# Altium PCB _PCB.PcbDoc
Units mm, origin at the board's own origin, x right, y up, seen from the top; angles counter-clockwise.
Board outline 38.25 x 58.75 mm, 4 copper layers (L1 SIG, L2 (GND), L3 (PWR), L4 SIG), stack 1.586 mm thick; 63 components, 57 nets, 281 pads, 67 vias.
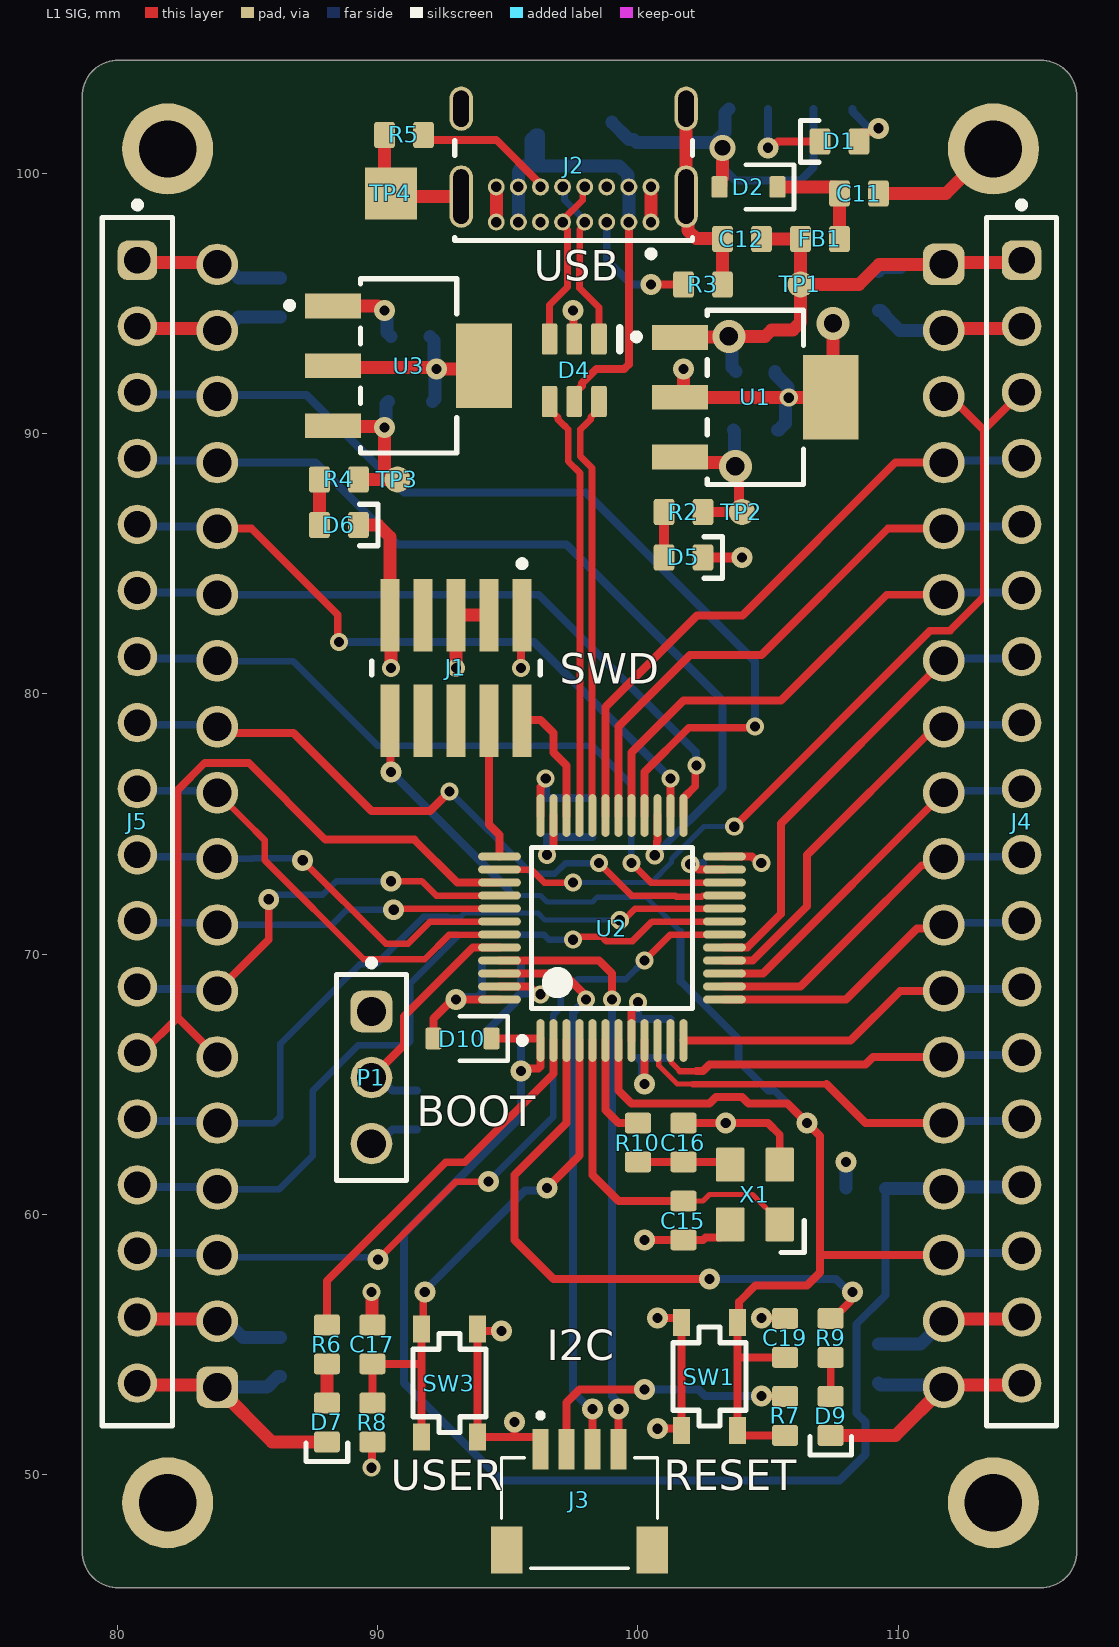
[diagram p0: L1 SIG view]
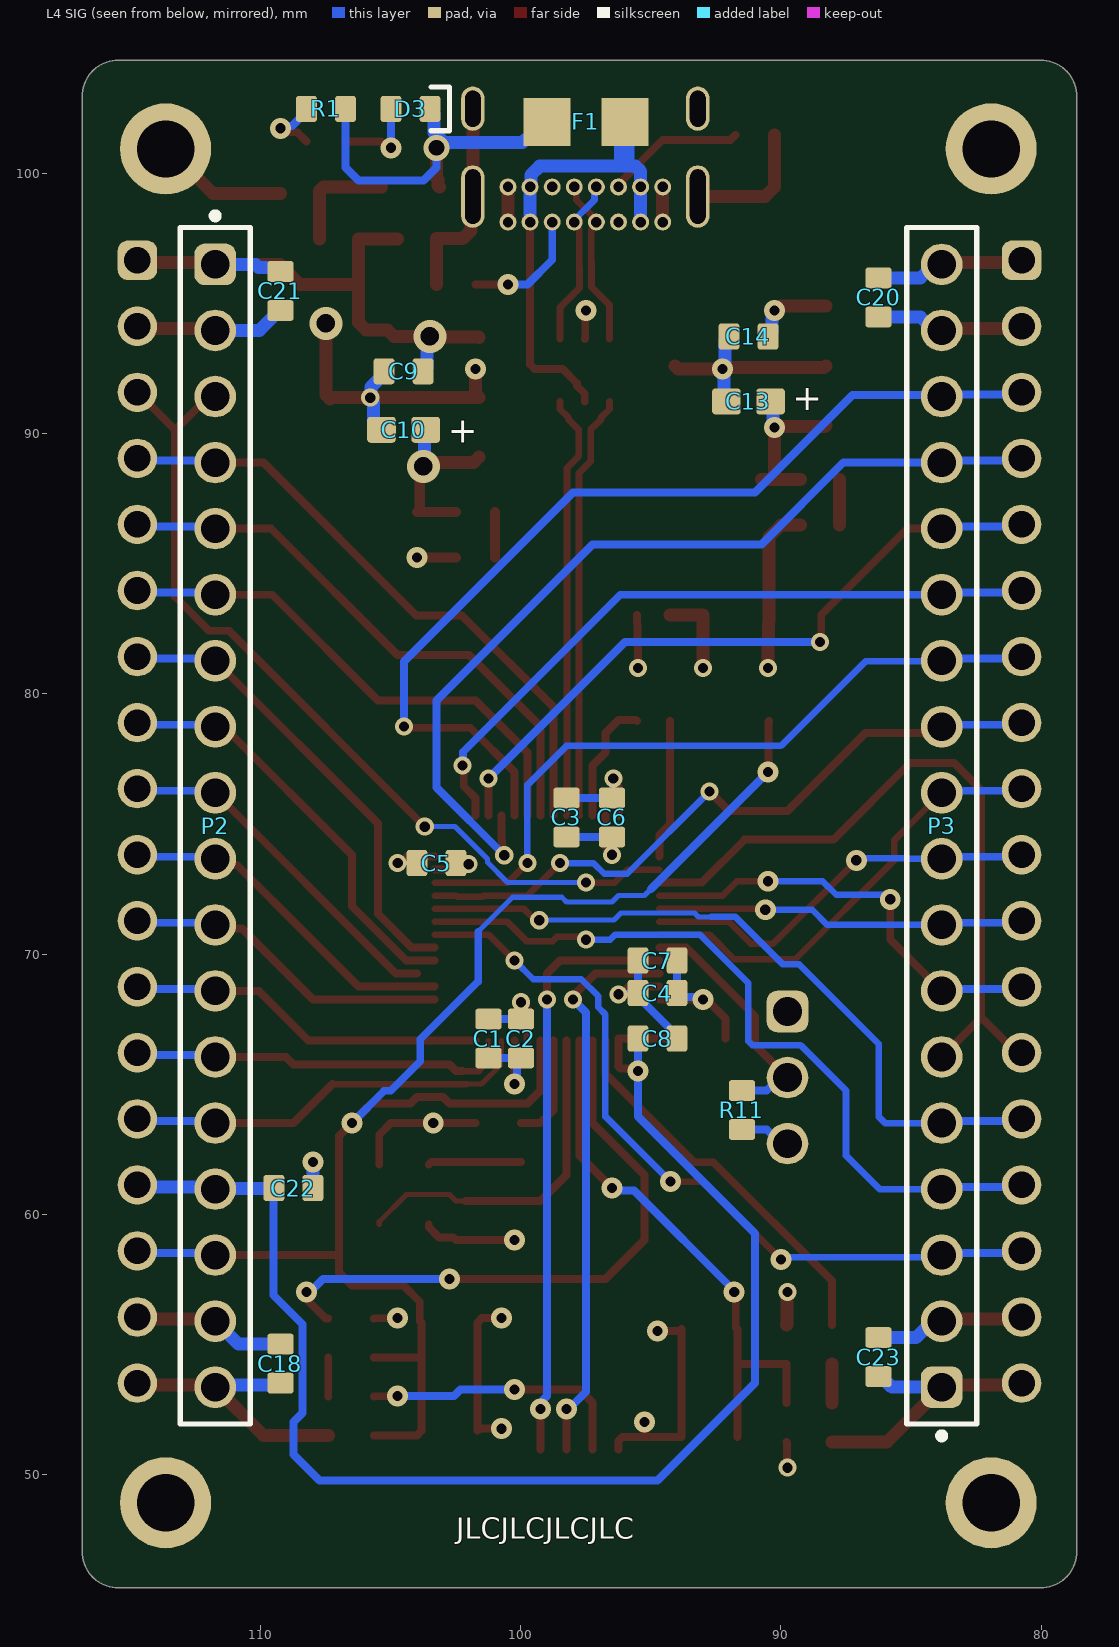
[diagram p1: L4 SIG view, seen from below]
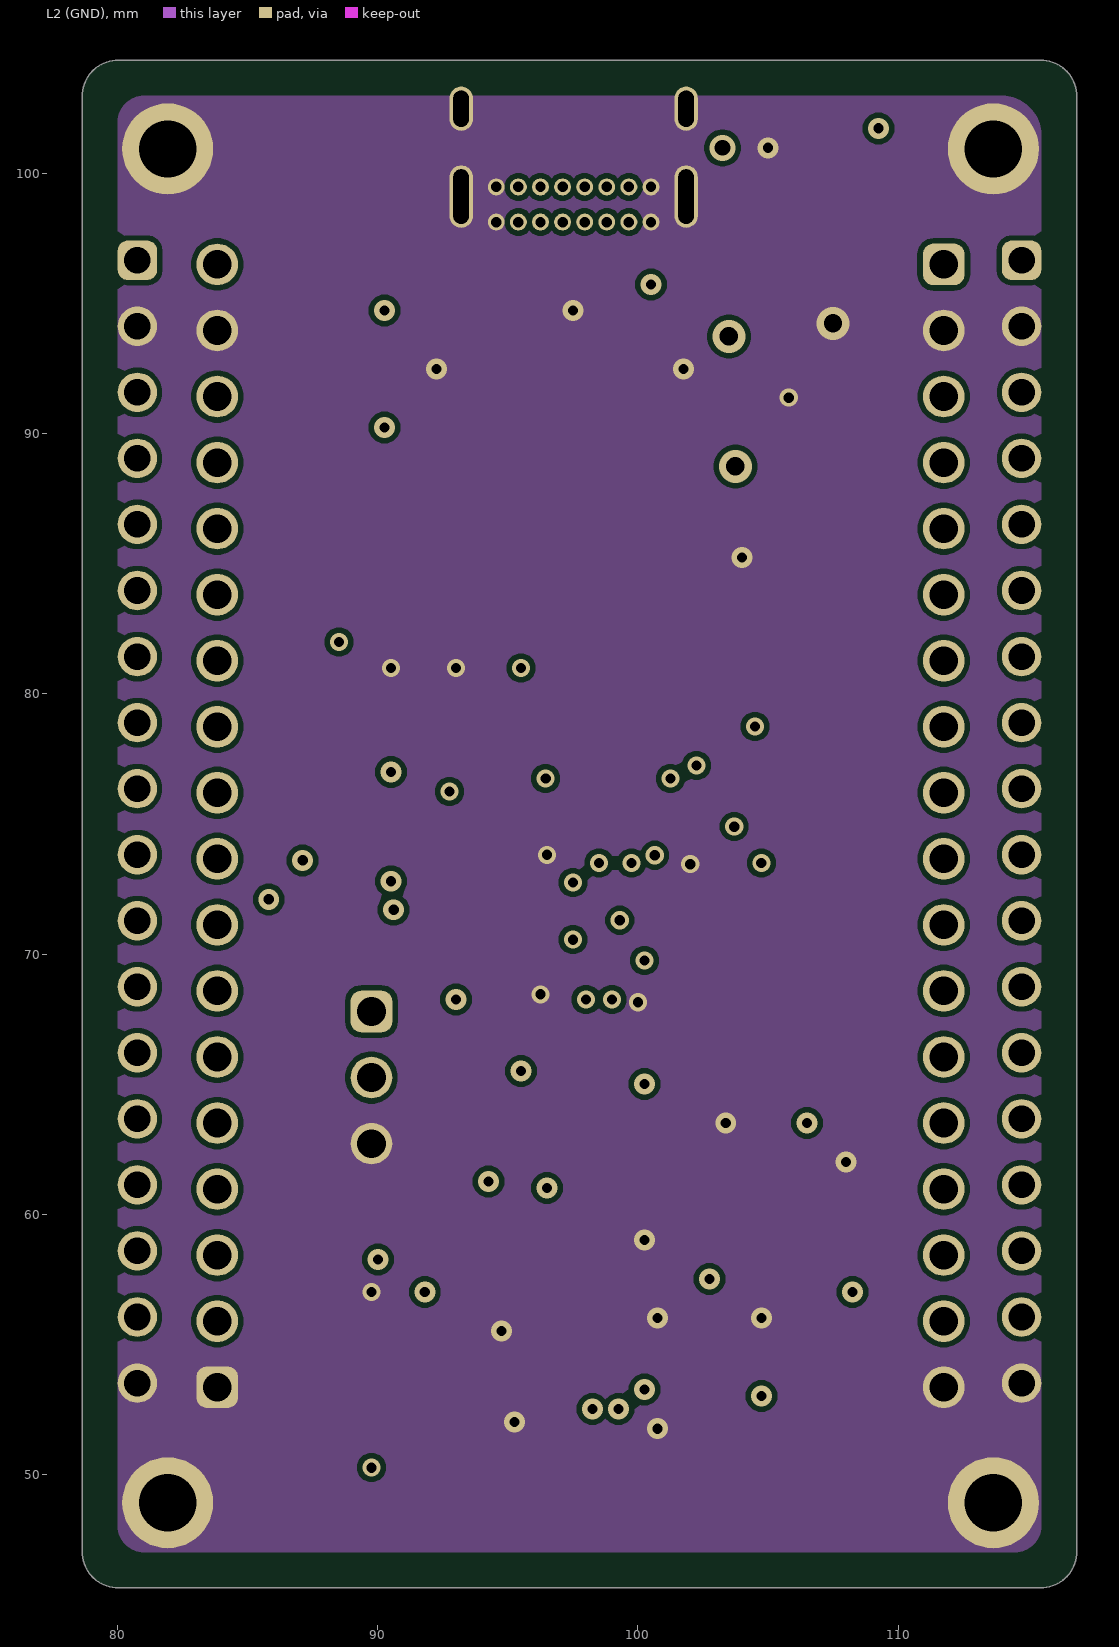
[diagram p2: L2 (GND)]
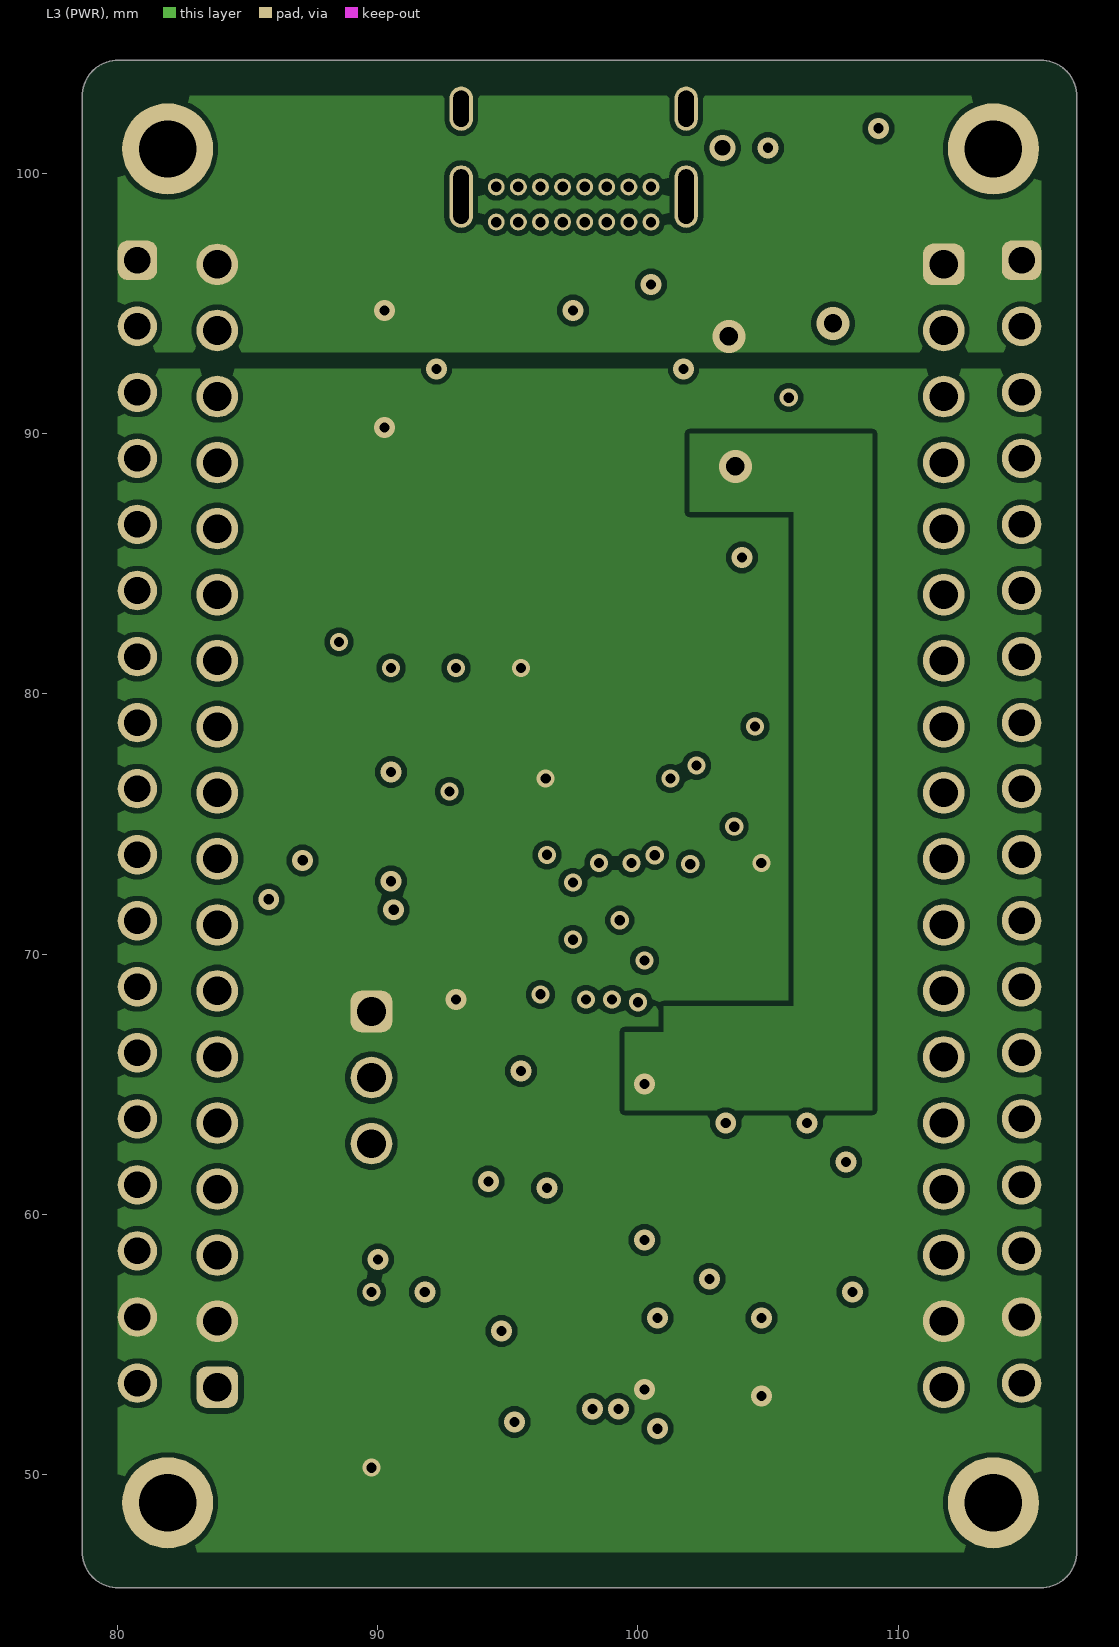
[diagram p3: L3 (PWR)]
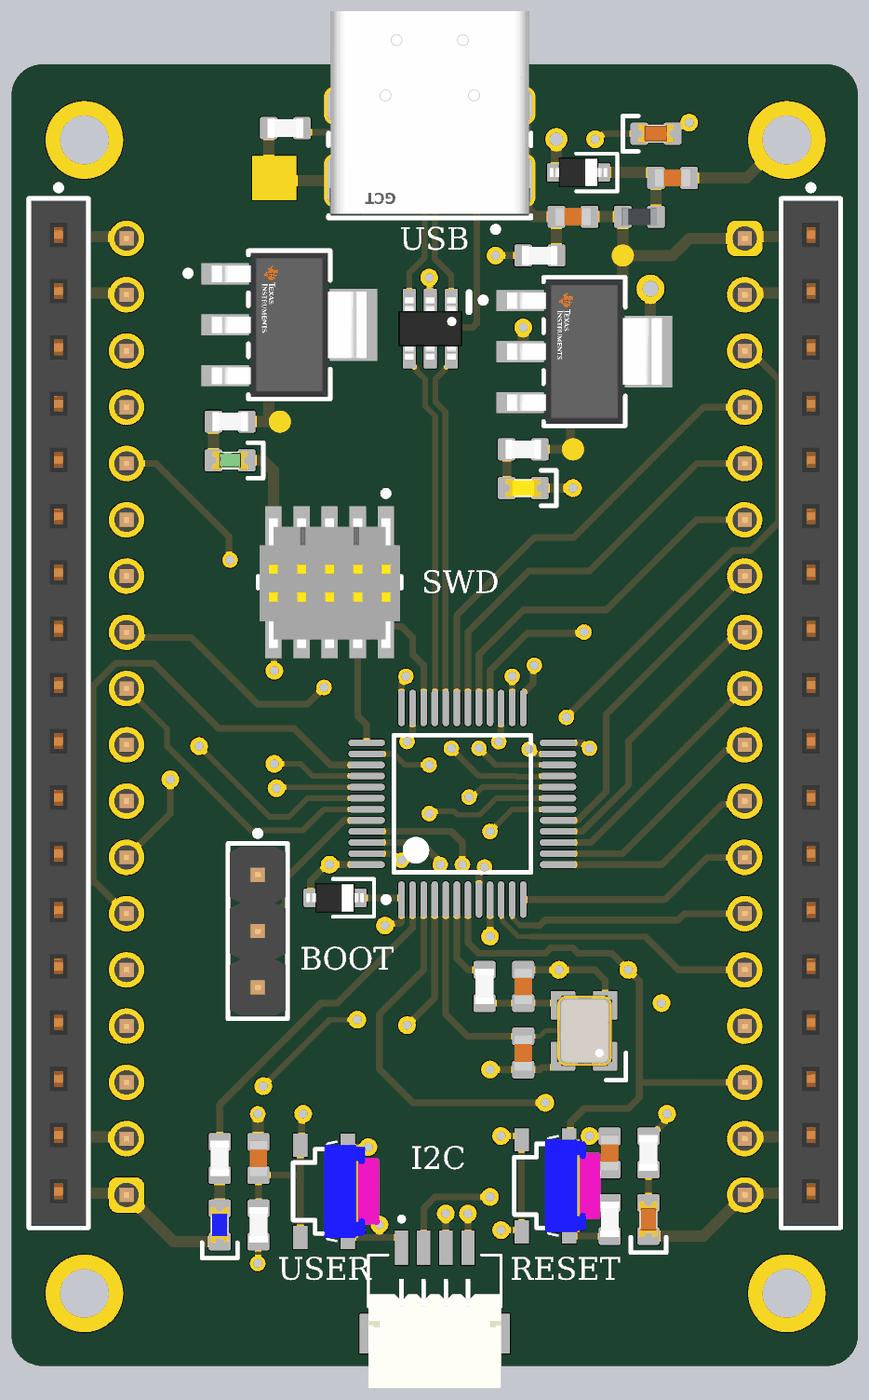
[diagram p4: 3D render of the assembled board from above, using the file's embedded part models]
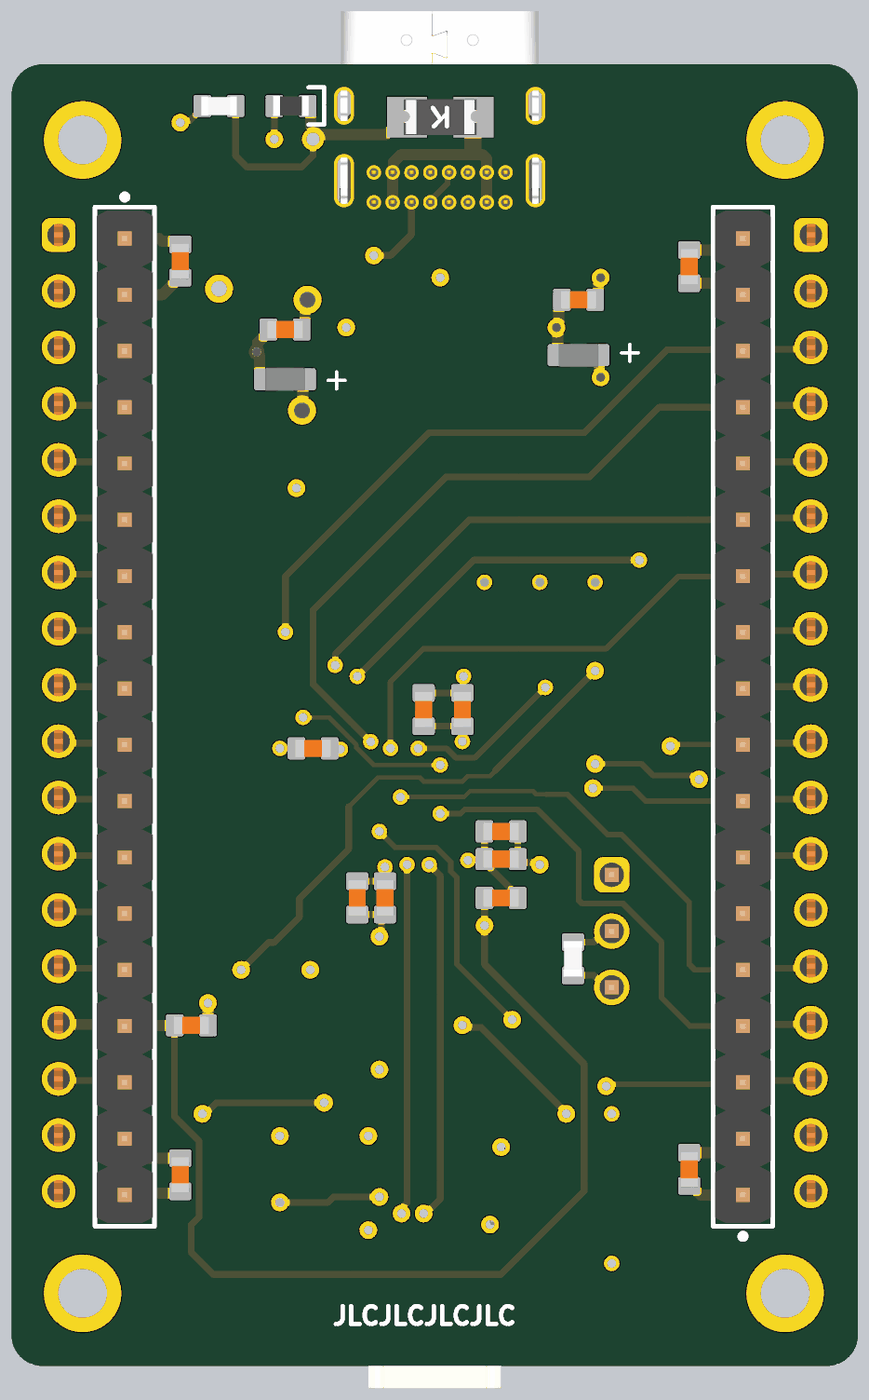
[diagram p5: 3D render of the assembled board from below, using the file's embedded part models]

## Layer stack, top to bottom
Top Solder: solder mask 0.0254, SM-001, Dk 4
L1 SIG: signal copper 0.035
Dielectric 1: prepreg 0.2104, PP-017, Dk 4.6
L2 (GND): signal copper 0.0152
Dielectric 3: core 1.065, Core-039, Dk 4.6
L3 (PWR): signal copper 0.0152
Dielectric 5: prepreg 0.2104, PP-017, Dk 4.6
L4 SIG: signal copper 0.035
Bottom Solder: solder mask 0.0254, SM-001, Dk 4

## Board outline
78.623,47.02 78.623,102.98 cw(c80.02,102.98) 80.02,104.377 115.48,104.377 cw(c115.48,102.98) 116.877,102.98 116.877,47.02 cw(c115.48,47.02) 115.48,45.623 80.02,45.623 cw(c80.02,47.02)

## Design rules (kind name [scope] priority, off if disabled: settings)
BoardOutlineClearance [All] p1: gap=0.2 ignorepadtopadclearanceinfootprint=FALSE
Clearance [All] p1: gap=0.2 ignorepadtopadclearanceinfootprint=FALSE
DiffPairsRouting [All] p1: maxlimit=0.254 minlimit=0.203 mostfreqgap=0.254 toplayer_maxgap=0.203 toplayer_prefgap=0.203 toplayer_minwidth=0.26 toplayer_maxwidth=0.26 toplayer_prefwidth=0.271 bottomlayer_maxgap=0.203 bottomlayer_prefgap=0.203 bottomlayer_minwidth=0.26 bottomlayer_maxwidth=0.26 bottomlayer_prefwidth=0.271 impedanceprofiledriven=TRUE impedanceprofileid={A64A18E8-3830-456C-9E55-FE37FD83D48E} impedanceprofilevalue=90.000000 maxuncoupledlength=12.7
HoleSize [All] p1: absolutevalues=TRUE maxlimit=6.3 minlimit=0.15 maxpercent=80.000 minpercent=20.000
HoleToHoleClearance [All] p1: gap=0.2 allowstackedmicrovias=TRUE
MinimumSolderMaskSliver [All] p1: minsoldermaskwidth=0.05
PlaneClearance [All] p1: clearance=0.2
PolygonConnect [All] p1: connectstyle=Direct reliefconductorwidth=0.254 reliefentries=4 polygonreliefangle="90 Angle" airgapwidth=0.254
RoutingVias [All] p1: holewidth=0.4 width=0.8 viastyle="Through Hole" minholewidth=0.15 minwidth=0.25 maxholewidth=0.711 maxwidth=1.27
SilkToSilkClearance [All] p1: silktosilkclearance=0.15
SilkToSolderMaskClearance [IsPad] p1: minsilkscreentomaskgap=0.15 clearancetoexposedcopper=TRUE
SolderMaskExpansion [All] p1: expansion=0.05 istentingtop=FALSE
SolderMaskExpansion SolderMaskExpansion_1 [All] p2: expansion=0.05 istentingtop=FALSE
SupplyNets "Schematic Supply Nets_5" [InNet('+5V')] p1: voltage=0.000
SupplyNets "Schematic Supply Nets_4" [InNet('GND')] p2: voltage=0.000
SupplyNets "Schematic Supply Nets_3" [InNet('VBUS RP')] p3: voltage=0.000
SupplyNets "Schematic Supply Nets_2" [InNet('VBUS')] p4: voltage=0.000
SupplyNets "Schematic Supply Nets_1" [InNet('+3V3A')] p5: voltage=0.000
SupplyNets "Schematic Supply Nets" [InNet('+3V3')] p6: voltage=0.000
Width [All] p1: maxlimit=1 minlimit=0.2 preferedwidth=0.3 midlayer1_minwidth=0.254 midlayer1_maxwidth=0.254 midlayer1_prefwidth=0.254 midlayer2_minwidth=0.254 midlayer2_maxwidth=0.254 midlayer2_prefwidth=0.254 minimp=50.000000 maximp=50.000000 favimp=50.000000
23 further rules are at their usual default settings.

## Classes and differential pairs
differential pair USB_D: +USB_D_P -USB_D_N
differential pair USB_CONN_D: +USB_CONN_D_P -USB_CONN_D_N

## Components (designator, comment, footprint, x,y, rotation, side; value= is the part's Value field where it differs from the comment)
C1 "1U" CAP_0603 101.25,66.75 r270 bottom
C2 "10n" CAP_0603 100,66.75 r270 bottom
C3 "4U7" CAP_0603 98.25,75.25 r90 bottom
C4 "100n" CAP_0603 94.75,68.5 r180 bottom
C5 "100n" CAP_0603 103.25,73.5 r0 bottom
C6 "100n" CAP_0603 96.5,75.25 r90 bottom
C7 "4U7" CAP_0603 94.75,69.75 r180 bottom
C8 "100n" CAP_0603 94.75,66.75 r0 bottom
C9 "0U47" CAP_0603 104.515,92.412 r180 bottom
C10 "33U" CAP_TANT_0603 104.515,90.162 r0 bottom
C11 "4U7" CAP_0603 108.5,99.25 r180 top
C12 "4U7" CAP_0603 104,97.5 r0 top
C13 "33U" CAP_TANT_0603 91.25,91.25 r0 bottom
C14 "0U47" CAP_0603 91.25,93.75 r180 bottom
C15 "10p" CAP_0603 101.75,59.75 r90 top
C16 "10p" CAP_0603 101.75,62.75 r270 top
C17 "100n" CAP_0603 89.785,54.985 r270 top
C18 "4U7" CAP_0603 109.25,54.25 r270 bottom
C19 "100n" CAP_0603 105.66,55.235 r270 top
C20 "4U7" CAP_0603 86.25,95.25 r270 bottom
C21 "4U7" CAP_0603 109.25,95.5 r270 bottom
C22 "1U" CAP_0603 108.75,61 r180 bottom
C23 "4U7" CAP_0603 86.25,54.5 r270 bottom
D1 "RED" LED_0603_RED 107.75,101.25 r0 top
D2 "BAT60AE6327HTSA1" SOD-323 104.25,99.5 r0 top
D3 "SY205208DXC" D_0603 104.25,102.5 r0 bottom
D4 "USBLC6-2SC6" SOT-23-6 97.55,92.45 r180 top
D5 "YELLOW" LED_0603_YELLOW 101.75,85.25 r180 top
D6 "GREEN" LED_0603_GREEN 88.5,86.5 r180 top
D7 "BLUE" LED_0603_BLUE 88.035,51.985 r90 top
D9 "RED" LED_0603_RED 107.41,52.235 r90 top
D10 "BAT60AE6327HTSA1" SOD-323 93.25,66.75 r0 top
F1 "NANOSMD175LR-2" FUSE_1206 97.5,102 r0 bottom
FB1 "120R" FB_0603 107,97.5 r180 top
J1 "FTSH-105-01-L-DV-K-TR" FP-FTSH-105-01-L-DV-K-TR-MFG 93,81 r180 top
J2 "USB4085-GF-A" FP-USB4085-GF-A-MFG 97.525,102.175 r180 top
J3 "PRT-14417" SPARKFUN_PRT-14417 97.75,48.5 r0 top
J4 "61301811821" 61301811821 114.75,75.09 r270 top
J5 "61301811821" 61301811821 80.75,75.09 r270 top
P1 "61300311121" 61300311121 89.75,65.25 r270 top
P2 "61301811121" 61301811121 111.76,74.93 r270 bottom
P3 "61301811121" 61301811121 83.82,74.93 r90 bottom
R1 "560" RES_0603 107.5,102.5 r0 bottom
R2 "1K" RES_0603 101.75,87 r0 top
R3 "5K1" RES_0603 102.5,95.75 r0 top
R4 "1K" RES_0603 88.5,88.25 r0 top
R5 "5K1" RES_0603 91,101.5 r0 top
R6 "1K" RES_0603 88.035,54.985 r90 top
R7 "10K" RES_0603 105.66,52.235 r90 top
R8 "10K" RES_0603 89.785,51.985 r270 top
R9 "1K" RES_0603 107.41,55.235 r90 top
R10 "0R" RES_0603 100,62.75 r270 top
R11 "100K" RES_0603 91.5,64 r90 bottom
SW1 "SKRPANE010" SKRPANE010 102.75,53.75 r270 top
SW3 "SKRPANE010" SKRPANE010 92.75,53.5 r270 top
TP1 "TP_NOBOM" PAD_RND_1MM 106.25,95.75 r90 top
TP2 "TP_NOBOM" PAD_RND_1MM 104,87 r90 top
TP3 "TP_NOBOM" PAD_RND_1MM 90.75,88.25 r90 top
TP4 "Pad" PAD_SQ_2MM 90.5,99.25 r0 top
U1 "LM3940IMPX-3.3/NOPB" FP-DCY0004A-MFG 104.515,91.412 r0 top
U2 "STM32F072C8T6" STM-LQFP48_M 99,71 r90 top
U3 "LM3940IMPX-3.3/NOPB" FP-DCY0004A-MFG 91.177,92.622 r0 top
X1 "24MHz" XTAL_3225 104.5,60.75 r90 top

## Footprints (in the part's own frame and the unit in brackets; to place one, negate y for a bottom-side part, rotate by r counter-clockwise, add the part's x,y. Pads: shape width x height; smd on the part's side, far side on the other; paste and mask are expansions set on the pad)
61300311121 [mm] "Pin Header, pitch 2.54 mm, THT, Vertical, single row, 3p"
  rrect50% 1.6x1.6 hole 1.1: 1(-2.54,0)
  round 1.6 hole 1.1: 2(0,0) 3(2.54,0)
  silkscreen extent -4.53,-1.35 3.96,1.35, body extent -3.81,-1.27 3.81,1.27, height 8.57
61301811121 [mm] "Pin Header, pitch 2.54 mm, THT, Vertical, single row, 18p"
  rrect50% 1.6x1.6 hole 1.1: 1(-21.59,0)
  round 1.6 hole 1.1: 2(-19.05,0) 3(-16.51,0) 4(-13.97,0) 5(-11.43,0) 6(-8.89,0) 7(-6.35,0) 8(-3.81,0) 9(-1.27,0) 10(1.27,0) 11(3.81,0) 12(6.35,0) 13(8.89,0) 14(11.43,0) 15(13.97,0) 16(16.51,0) 17(19.05,0) 18(21.59,0)
  silkscreen extent -23.58,-1.35 23.01,1.35, body extent -22.86,-1.27 22.86,1.27, height 8.57
61301811821 [mm] "Socket Header, Pitch 2.54 mm, THT, Vertical, single row, 18p"
  rrect50% 1.52x1.52 hole 1.02: 1(-21.59,0)
  round 1.52 hole 1.02: 2(-19.05,0) 3(-16.51,0) 4(-13.97,0) 5(-11.43,0) 6(-8.89,0) 7(-6.35,0) 8(-3.81,0) 9(-1.27,0) 10(1.27,0) 11(3.81,0) 12(6.35,0) 13(8.89,0) 14(11.43,0) 15(13.97,0) 16(16.51,0) 17(19.05,0) 18(21.59,0)
  silkscreen extent -23.84,-1.35 23.24,1.35, body extent -23.11,-1.25 23.11,1.25, height 8.55
CAP_0603 [mm]
  rrect25% 0.8x1 smd: 1(-0.75,0) 2(0.75,0)
  body extent -0.8,-0.4 0.8,0.4, height 0.51
CAP_TANT_0603 [mm]
  rrect25% 1.1x1 smd: A(-0.85,0) K(0.85,0)
  body extent -0.9,-0.53 0.9,0.53, height 0.91
D_0603 [mm]
  rrect25% 0.8x1 smd: A(0.75,0) K(-0.75,0)
  silkscreen extent -1.5,-0.84 -0.8,0.84, body extent -0.8,-0.45 0.8,0.45, height 0.81
FB_0603 [mm]
  rrect25% 0.8x1 smd: 1(-0.75,0) 2(0.75,0)
  body extent -0.8,-0.4 0.8,0.4, height 0.81
FP-DCY0004A-MFG [mm]
  rect 2.15x0.95 smd paste+0 mask+0: 1(-2.9,2.3) 2(-2.9,0) 3(-2.9,-2.3)
  rect 2.15x3.25 smd paste+0 mask+0: 4(2.9,0)
  silkscreen extent -4.7,-3.35 1.85,3.35, body extent -4.08,-3.45 4.08,3.45, height 0.25
FP-FTSH-105-01-L-DV-K-TR-MFG [mm]
  rect 0.74x2.79 smd paste+0 mask+0: 1(-2.54,-2.035) 2(-2.54,2.035) 3(-1.27,-2.035) 4(-1.27,2.035) 5(0,-2.035) 6(0,2.035) 7(1.27,-2.035) 8(1.27,2.035) 9(2.54,-2.035) 10(2.54,2.035)
  silkscreen extent -3.24,-4.13 3.24,0.27, body extent -3.34,-3.53 3.34,3.53, height 0.25
FP-USB4085-GF-A-MFG [mm]
  rrect100% 0.9x2.4 hole 2.1 slot 0.6 at 0 deg paste-2539.97 mask+0: 1(-4.325,3.045) 2(4.325,3.045)
  rrect100% 0.9x1.7 hole 1.4 slot 0.6 at 0 deg paste-2539.97 mask+0: 3(-4.325,-0.335) 4(4.325,-0.335)
  round 0.65 hole 0.4 paste-2539.97 mask+0: A1(-2.975,4.025) A4(-2.125,4.025) A5(-1.275,4.025) A6(-0.425,4.025) A7(0.425,4.025) A8(1.275,4.025) A9(2.125,4.025) A12(2.975,4.025) B1(2.975,2.675) B4(2.125,2.675) B5(1.275,2.675) B6(0.425,2.675) B7(-0.425,2.675) B8(-1.275,2.675) B9(-2.125,2.675) B12(-2.975,2.675)
  silkscreen extent -4.57,0.89 4.57,5.37, body extent -4.87,-4.83 4.87,4.83, height 0.25
FUSE_1206 [mm]
  rect 1.8x1.84 smd: 1(-1.5,0) 2(1.5,0)
  body extent -1.65,-0.82 1.65,0.81, height 0.84
LED_0603_BLUE [mm]
  rrect25% 0.8x1 smd: A(0.75,0) K(-0.75,0)
  silkscreen extent -1.5,-0.8 -0.8,0.8, body extent -0.8,-0.4 0.8,0.4, height 0.6
LED_0603_GREEN [mm]
  rrect25% 0.8x1 smd: A(0.75,0) K(-0.75,0)
  silkscreen extent -1.5,-0.8 -0.8,0.8, body extent -0.8,-0.4 0.8,0.4, height 0.6
LED_0603_RED [mm]
  rrect25% 0.8x1 smd: A(0.75,0) K(-0.75,0)
  silkscreen extent -1.5,-0.8 -0.8,0.8, body extent -0.8,-0.4 0.8,0.4, height 0.6
LED_0603_YELLOW [mm]
  rrect25% 0.8x1 smd: A(0.75,0) K(-0.75,0)
  silkscreen extent -1.5,-0.8 -0.8,0.8, body extent -0.8,-0.4 0.8,0.4, height 0.6
PAD_RND_1MM [mm]
  round 1 smd paste-0.5 mask+0: 1(0,0)
PAD_SQ_2MM [mm]
  rect 2x2 smd paste-1: 1(0,0)
RES_0603 [mm]
  rrect25% 0.8x1 smd: 1(-0.75,0) 2(0.75,0)
  body extent -0.8,-0.43 0.8,0.43, height 0.52
SKRPANE010 [mm]
  rect 1.05x0.65 smd: 12(-2.075,1.075) 12(2.075,1.075) 34(-2.075,-1.075) 34(2.075,-1.075)
  silkscreen extent -1.9,-1.4 1.9,1.4, body extent -2.3,-1.6 2.3,1.6, height 2.51
SOD-323 [mm]
  rrect25% 0.63x0.83 smd: A(-1.115,0) K(1.115,0)
  silkscreen extent -0.1,-0.85 1.75,0.85, body extent -1.3,-0.68 1.3,0.68, height 1.1
SOT-23-6 [mm]
  rrect25% 0.6x1.2 smd: 1(-0.95,-1.2) 2(0,-1.2) 3(0.95,-1.2) 4(0.95,1.2) 5(0,1.2) 6(-0.95,1.2)
  silkscreen extent -1.75,-1.63 -1.75,-0.76, body extent -1.45,-1.4 1.45,1.4, height 1.45
SPARKFUN_PRT-14417 [mm]
  rect 0.6x1.55 smd: 1(-1.5,2.45) 2(-0.5,2.45) 3(0.5,2.45) 4(1.5,2.45)
  rect 1.2x1.8 smd: S1(-2.8,-1.425) S2(2.8,-1.425)
  silkscreen extent -3,-2.12 3,3.85, body extent -3,-3.9 3,1.05, height 3.25
STM-LQFP48_M [mm] "QFP, 48-Leads, Body 7x7mm, Pitch 0.5mm, IPC Low Density"
  oval 1.65x0.3 smd: 1(-4.325,2.75) 2(-4.325,2.25) 3(-4.325,1.75) 4(-4.325,1.25) 5(-4.325,0.75) 6(-4.325,0.25) 7(-4.325,-0.25) 8(-4.325,-0.75) 9(-4.325,-1.25) 10(-4.325,-1.75) 11(-4.325,-2.25) 12(-4.325,-2.75) 25(4.325,-2.75) 26(4.325,-2.25) 27(4.325,-1.75) 28(4.325,-1.25) 29(4.325,-0.75) 30(4.325,-0.25) 31(4.325,0.25) 32(4.325,0.75) 33(4.325,1.25) 34(4.325,1.75) 35(4.325,2.25) 36(4.325,2.75)
  oval 0.3x1.65 smd: 13(-2.75,-4.325) 14(-2.25,-4.325) 15(-1.75,-4.325) 16(-1.25,-4.325) 17(-0.75,-4.325) 18(-0.25,-4.325) 19(0.25,-4.325) 20(0.75,-4.325) 21(1.25,-4.325) 22(1.75,-4.325) 23(2.25,-4.325) 24(2.75,-4.325) 37(2.75,4.325) 38(2.25,4.325) 39(1.75,4.325) 40(1.25,4.325) 41(0.75,4.325) 42(0.25,4.325) 43(-0.25,4.325) 44(-0.75,4.325) 45(-1.25,4.325) 46(-1.75,4.325) 47(-2.25,4.325) 48(-2.75,4.325)
  silkscreen extent -4.45,-3.1 3.1,3.57, body extent -3.5,-3.5 3.5,3.5, height 1.6
XTAL_3225 [mm]
  rrect10% 1.3x1.1 smd: 1(-1.15,-0.95) 2(1.15,-0.95) 3(1.15,0.95) 4(-1.15,0.95)
  silkscreen extent -2.23,-1.89 -1,-1, body extent -1.6,-1.28 1.6,1.22, height 0.61

## Part data
C1 C2 C3 C4 C5 C6 C7 C8 C9 C11 C12 C14 C15 C16 C17 C18 C19 C20 C21 C22 C23: library part CAP_0603, "Capacitor SMD 0603"
C10 C13: library part CAP_TANT_0603, "Capacitor SMD Tantalum 0603"
D1 D9: library part LED_0603_RED, "LED 0603 RED SMD"
D2 D10: library part D_SCHOTTKY_SOD_323, "Diode Schottky SMD SOD-323"
D3: library part D_TVS_BI_0603, "Diode TVS / ESD Bidirectional 0603"
D4: "Low-Capacitance ESD Protection USB", Manufacturer=STMicroelectronics, Distributor Link=https://www.mouser.de/ProductDetail/STMicroelectronics/USBLC6-2SC6?qs=po45yt2pPpu%2FhNIlwQdTlg%3D%3D, Manufacturer Part Number=USBLC6-2SC6
D5: library part LED_0603_YELLOW, "LED 0603 YELLOW SMD"
D6: library part LED_0603_GREEN, "LED 0603 GREEN SMD"
D7: library part LED_0603_BLUE, "LED 0603 BLUE SMD"
F1: library part FUSE_PPTC_1206, "Fuse PPTC SMD 1206"
FB1: library part FB_0603, "Ferrite Bead SMD 0603"
J1: library part CMP-2000-06293-2, "CONN HEADER SMD 10POS 1.27MM", Color=Black, Current Rating=1.75A, Max Operating Temperature=125°C, Min Operating Temperature=-55°C, Package Quantity=550, Connector Type="Male Pin", Contact Material=Bronze, Contact Mating Length=0.12inch, Contact Plating=Gold, Depth=3.43mm, Gender=Male, Housing Color=Black, Housing Material=Polymer, Lead Free="Lead Free", Length=6.35mm, Max Current Rating=1.75A, Mount="Surface Mount", Number of Contacts=10, Number of Positions=10, Number of Rows=2, Orientation=Straight, Packaging="Tape and Reel", Pitch=1.27mm, Radiation Hardening=No, REACH SVHC="No SVHC", Row Spacing=0.05inch, Termination=Solder
J2: library part CMP-196119-000001-2, "CONN RCPT USB2.0 TYPE C 24POS RA", Contact Material="Copper Alloy", Contact Plating=Gold, Gender=Receptacle, Number of Positions=16, Orientation="Right Angle", USB Standard="USB 2.0"
J3: library part CMP-002-00071-1, "QWIIC JST CONNECTOR - SMD 4-PIN", Case/Package=None, Check_prices=https://www.snapeda.com/parts/PRT-14417/SparkFun+Electronics/view-part/?ref=eda, Component Type=Standard, Design Item ID=PRT-14417, MF="SparkFun Electronics", MP=PRT-14417, Pins=4, SnapEDA_Link=https://www.snapeda.com/parts/PRT-14417/SparkFun+Electronics/view-part/?ref=snap, Source=PRT-14417.SchLib
J4 J5: library part CMP-1502-01346-3, Contact Resistance=20mΩ, Current Rating=3A, Operating Supply Voltage=250V, Gender=Female, Lead Pitch=2.54mm, NexarPartId=61924740, Number of Pins=18, Orientation=Vertical, RoHS=Non-Compliant
P1: library part CMP-1502-01062-3, Color=Black, Contact Resistance=20mΩ, Current Rating=3A, Max Operating Temperature=105°C, Min Operating Temperature=-40°C, Operating Supply Voltage=250V, Connector Type="Male Pin", Contact Material=Copper, Contact Mating Length=5.9944mm, Contact Plating=Gold, Gender=Male, Height=8.94mm, Lead Free="Lead Free", Lead Pitch=2.54mm, Mount="Through Hole", NexarPartId=32855521, Number of Contacts=3, Number of Pins=3, Number of Positions=3, Number of Rows=1, Orientation=Vertical, Packaging=Bulk, Pitch=2.54mm, REACH SVHC=Unknown, RoHS=Compliant, Termination=Solder, Voltage Rating=250V
P2 P3: library part CMP-1502-01099-4, Color=Black, Contact Resistance=20mΩ, Current Rating=3A, Max Operating Temperature=105°C, Min Operating Temperature=-40°C, Operating Supply Voltage=250V, Connector Type="Male Pin", Contact Material=Copper, Contact Mating Length=5.9944mm, Contact Plating=Gold, Gender=Male, Height=8.89mm, Lead Free="Lead Free", Lead Pitch=2.54mm, Mount="Through Hole", NexarPartId=32855552, Number of Contacts=18, Number of Pins=18, Number of Positions=18, Number of Rows=1, Orientation=Vertical, Packaging=Bulk, Pitch=2.54mm, REACH SVHC=Unknown, RoHS=Compliant, Termination=Solder, Voltage Rating=250V
R1 R2 R3 R4 R5 R6 R7 R8 R9 R10 R11: library part RES_0603, "Resistor SMD 0603"
SW1 SW3: "Tactile Switch SMD SPST", Manufacturer="Alps Alpine", Manufacturer Part Number=SKRPANE010
TP1 TP2 TP3: library part TEST_POINT_RND_1MM, "Test Point Round 1mm (NO BOM)"
TP4: library part PAD_SQ_2MM, "Test Point Square 2mm"
U1 U3: library part CMP-04917-000180-1, "IC REG LINEAR 3.3V 1A SOT223-4", Case/Package=SOT-223, Dropout Voltage=500mV, Max Input Voltage=7.5V, Max Operating Temperature=125°C, Max Output Current=1A, Min Input Voltage=4.5V, Min Operating Temperature=-40°C, Output Voltage=3.3V, Package Quantity=2000, Quiescent Current=15mA, Contact Plating=Tin, Lead Free="Lead Free", Mount="Surface Mount", Number of Outputs=1, Number of Pins=4, Number of Regulators=1, Output Current=1A, Output Type=Fixed, Packaging="Tape and Reel", Polarity=Positive, Radiation Hardening=No, RoHS Compliant=Yes
U2: library part CMP-0304-00166-4, "ARM Cortex-M0 32-bit MCU, 64 KB Flash, 16 KB Internal RAM, 37 I/Os, 48-Pin LQFP, -40 to 85 degC, Tray", I/Os (High Current)=37, Manufacturer=STMicroelectronics, Operating Frequency(F) (Processor speed) (MHz)=48, Package Description="48-Pin Low Profile Quad Flat Package, Body 7 x 7 mm, Pitch 0.5 mm", Package Reference=LQFP48, Supply Voltage(Vcc) min (V)=2, ComponentLink1Description="Manufacturer URL", ComponentLink1URL=http://www.st.com/, ComponentLink2Description=Datasheet, ComponentLink2URL=http://www.st.com/st-web-ui/static/active/en/resource/technical/document/datasheet/DM00090510.pdf, Core="ARM Cortex-M0", D/A Converter=1, DatasheetVersion="Rev. 5", FLASH Size (Prog) (kB)=64, Internal RAM Size (kB)=16, Mounting Technology="Surface Mount", Packing=Tray, PartNumber=STM32F072C8T6
X1: library part TSX-3225_24.0000MF15X-AC, "Crystal SMD 24MHz 10PPM 7pF 3225", Manufacturer=Epson, Manufacturer Part Number="TSX-3225 24.0000MF15X-AC"

## Free pads (board coordinates)
  round 3.5 hole 2.2: 1(81.915,100.965) 2(113.665,100.965) 3(113.665,48.895) 4(81.915,48.895)

## Via types
v1: diameter 0.8, hole 0.4, L1 SIG to L4 SIG, 35 vias
v2: diameter 0.7, hole 0.4, L1 SIG to L4 SIG, 27 vias
v3: diameter 1.27, hole 0.711, L1 SIG to L4 SIG, 3 vias
v4: diameter 0.8/0.8/0.8/0.8 (per signal layer), hole 0.4, L1 SIG to L4 SIG, 1 vias
v5: diameter 1, hole 0.6, L1 SIG to L4 SIG, 1 vias

## Nets (pads, with @x,y where several pads share a name; then routed paths per layer and width w, separated by ;. In a path a pad name is that pad's centre, name@x,y a point inside that pad or via, vN(x,y) a via of type N, cw(c..) or ccw(c..) an arc to the next point about the centre after c; other vN are vias at no path point)
+3V3: C3.2 C4.2 C5.2 C6.2 C7.2 C13.A C18.1 C23.1 D10.A J1.1 J3.2 J4.17 J5.17 P1.1 P2.17 P3.2 R4.2 R7.2 R8.2 TP3.1 U2.24 U2.36 U2.48 U3.3 | length 43.4
  L1 SIG w0.3: v2(89.75,50.25) 89.767,50.267 89.767,51.218 R8.2 ; D10.A 92.135,67.52 92.865,68.25 v1(93,68.25) U2.48 ; v2(95.5,81) 95.5,81.79 J1.1 ; U2.36 96.25,76.419 96.446,76.615 v2(96.446,76.75) ; J3.2 97.25,52.75 97.75,53.25 v1(100.25,53.25) ; U2.24 104.388,73.75 104.638,73.5 v2(104.746,73.5) ; v1(104.75,53) 104.757,52.993 105.653,52.993 R7.2
  L1 SIG w0.5: J5.17 80.83,55.96 83.74,55.96 P3.2 ; U3.3 88.313,90.286 90.214,90.286 v1(90.25,90.25) TP3.1@90.25,88.25 ; R4.2 TP3.1@90.25,88.25 ; TP3.1 TP3.1@90.25,88.25 ; P2.17 111.84,55.96 114.67,55.96 J4.17
  L4 SIG w0.3: v1(93,68.25) 93.096,68.346 93.846,68.346 C4.2 C7.2 ; v2(96.446,76.75) 96.473,76.723 96.473,76.027 C6.2 C3.2 ; v1(100.25,53.25) 102.327,53.25 102.577,53 v1(104.75,53)
  L4 SIG w0.5: P3.2 84.172,55.88 84.802,55.25 C23.1 ; v1(90.25,90.25) 90.307,90.307 90.307,91.157 C13.A ; C18.1 110.872,55 111.752,55.88 P2.17
+3V3A: C1.2 C2.2 C10.A R2.2 TP2.1 U1.3 U2.9 | length 10.9
  L1 SIG w0.3: v1(100.25,65) U2.9
  L1 SIG w0.4: R2.2 103.735,87 TP2.1 ; v3(103.75,88.75) 103.885,88.615 TP2.1@103.885,87.15
  L1 SIG w0.5: U1.3 101.829,88.897 103.603,88.897 v3(103.75,88.75)
  L4 SIG w0.3: v1(100.25,65) 100.154,65.096 100.154,65.846 C2.2 100.143,66 C1.2
  L4 SIG w0.5: C10.A 103.708,90.119 103.708,88.792 v3(103.75,88.75)
+5V: C9.2 C12.2 C14.2 C20.1 C21.1 FB1.2 J4.1 J5.1 P2.1 P3.18 TP1.1 U1.1 U3.1 | length 31.9
  L1 SIG w0.5: J5.1 80.83,96.6 83.74,96.6 P3.18 ; U3.1 89.997,94.922 90.169,94.75 v1(90.25,94.75) ; U1.1 101.634,93.731 103.481,93.731 v3(103.5,93.75) 104.885,93.75 105.135,94 105.957,94 106.25,94.293 TP1.1 ; C12.2 FB1.2 TP1.1 ; J4.1 114.67,96.6 111.84,96.6 P2.1 109.27,96.52 108.5,95.75 TP1.1
  L4 SIG w0.5: P3.18 84.118,96.52 84.638,96 C20.1 ; v1(90.25,94.75) 90.25,94.669 90.35,94.569 90.35,93.9 C14.2 ; v3(103.5,93.75) 103.48,93.73 103.48,93.394 103.615,93.259 103.615,92.562 C9.2 ; C21.1@109.385,96.385 C21.1 109.4,96.4 110.09,96.4 110.21,96.52 P2.1 P2.1@111.625,96.385
GND: C1.1 C2.1 C3.1 C4.1 C5.1 C6.1 C7.1 C8.1 C9.1 C10.K C11.1 C12.1 C13.K C14.1 C15.1 C16.1 C17.1 C18.2 C19.1 C20.2 C21.2 C22.2 C23.2 D1.K D3.A D4.2 D5.K D6.K D7.K D9.K J1.3 J1.5 J1.9 J2.1 J2.2 J2.3 J2.4 J2.A1 J2.A12 J2.B1 J2.B12 J3.1 J4.2 J4.18 J5.2 J5.18 P1.3 P2.2 P2.18 P3.1 P3.17 pad.1 pad.2 pad.3 pad.4 R3.2 R5.1 R11.1 SW1.34 SW3.12 TP4.1 U1.2 U1.4 U2.8 U2.23 U2.35 U2.47 U3.2 U3.4 X1.2 X1.4 | length 134.9
  L1 SIG w0.3: U2.47 95.843,68.75 96.147,68.446 v2(96.25,68.446) ; v1(94.75,55.5) 93.9,55.5 93.825,55.575 93.825,51.425 95.25,51.425 ; v1(95.25,52) 95.25,51.425 ; J3.1 96.25,51.275 96.1,51.425 95.25,51.425 ; v2(96.5,73.812) 96.5,73.885 96.75,74.135 U2.35 ; v1(97.5,94.75) 97.525,94.725 97.525,93.675 D4.2 ; U2.8 99.75,67.865 100,68.115 v2(100,68.142) ; v1(100.25,59) C15.1 102.5,59 102.6,59.1 103.15,59.1 103.55,59.5 X1.4 ; v1(100.75,51.75) 101.6,51.75 101.675,51.675 101.675,55.825 101.5,56 v1(100.75,56) ; C16.1 v1(103.375,63.5) 105,63.5 105.45,63.05 X1.2 ; v2(102.014,73.458) 102.122,73.458 102.33,73.25 U2.23 ; v1(104.75,56) 104.757,55.992 105.653,55.992 C19.1 ; v1(105,101) 105.135,101 105.385,101.25 D1.K@106.75,101.25
  L1 SIG w0.4: D5.K v1(104,85.25)
  L1 SIG w0.5: J5.18 80.83,53.42 83.74,53.42 P3.1 85.925,51.235 D7.K ; J5.2 80.83,94.06 83.74,94.06 P3.17 ; U3.2 88.341,92.557 92.193,92.557 v1(92.25,92.5) 93.955,92.5 U3.4 ; D6.K 90,86.5 90.46,86.04 J1.9 90.5,81.89 v2(90.5,81) ; v2(89.75,57) 89.767,56.983 89.767,55.752 C17.1 ; R5.1 90.25,99.5 TP4.1 90.62,99.13 J2.2 ; v2(93,81) J1.5 J1.3 ; J2.A12 J2.B1 ; J2.A1 J2.B12 ; v1(101.75,92.5) 101.75,91.547 U1.2 101.621,91.406 105.794,91.406 v2(105.8,91.4) 107.302,91.4 107.353,91.349 107.5,91.497 v3(107.5,94.25) ; J2.3 J2.1 101.927,99.053 101.927,97.821 102.24,97.508 C12.1@103.242,97.508 ; R3.2 C12.1 ; D9.K 109.905,51.485 P2.18 111.84,53.42 114.67,53.42 J4.18 ; C11.1 111.844,99.25 113.559,100.965 pad.2 ; P2.2 111.84,94.06 114.67,94.06 J4.2
  L4 SIG w0.3: P1.3 90.01,62.71 90.55,63.25 R11.1 ; C8.1 94,66.85 95.25,68.1 95.25,68.25 C4.1 ; C7.1 C4.1 ; v2(96.25,68.446) 96.223,68.473 95.527,68.473 C4.1 ; v2(96.5,73.812) C6.1 C3.1 ; v2(100,68.142) C2.1 C1.1 ; v2(102.014,73.458) 102.035,73.479 102.479,73.479 C5.1 ; v1(105,101) D3.A
  L4 SIG w0.5: P3.1 85.74,53.34 86.15,53.75 C23.2 ; P3.17 84.118,93.98 84.638,94.5 C20.2 ; C14.1 92.15,93.6 92.15,92.681 92.25,92.581 v1(92.25,92.5) 92.193,92.443 92.193,91.343 C13.K ; C9.1 105.265,92.312 105.762,91.815 105.762,91.438 v2(105.8,91.4) 105.8,91.346 105.665,91.211 105.665,90.412 105.415,90.162 C10.K ; C22.2 v1(108,62) ; C18.2 109.33,53.42 111.68,53.42 P2.18 ; C21.2 109.35,94.75 109.5,94.6 109.5,94.543 110.063,93.98 P2.2
"LED ANODE 1": D1.A R1.2 | length 2.6
  L1 SIG w0.3: D1.A@108.25,101.25 108.6,101.6 108.965,101.6 109.115,101.75 v1(109.25,101.75)
  L4 SIG w0.3: R1.2 108.25,102.4 108.804,101.846 109.154,101.846 v1(109.25,101.75)
"LED ANODE 2": D5.A R2.1 | length 1.8
  L1 SIG w0.4: D5.A R2.1
"LED ANODE 3": D6.A R4.1 | length 1.8
  L1 SIG w0.5: D6.A R4.1
"LED ANODE 4": D7.A R6.1 | length 1.5
  L1 SIG w0.5: D7.A R6.1
"LED ANODE 5": D9.A R9.1 | length 1.5
  L1 SIG w0.3: D9.A R9.1
"MCU BOOT0": P1.2 R11.2 U2.44 | length 9.6
  L1 SIG w0.3: P1.2 91,66.5 91,67.6 93.65,70.25 U2.44
  L4 SIG w0.3: P1.2 90.05,65.25 90.55,64.75 R11.2
"MCU NRST": C19.2 J1.10 J4.16 P2.16 R7.1 SW1.12 U2.7 | length 61.4
  L1 SIG w0.3: J1.10 90.48,78.945 90.48,77.02 v1(90.5,77) ; U2.7 99.25,64.75 99.75,64.25 102.75,64.25 103,64.5 104,64.5 104.25,64.25 105.75,64.25 v4(106.5,63.5) 107,63 107,58.5 ; R7.1 104,51.485 103.825,51.66 103.825,51.675 103.825,54.5 ; C19.2 103.84,54.485 103.825,54.5 ; P2.16 107.08,58.42 107,58.5 ; 103.825,54.5 103.825,55.825 103.89,55.89 103.89,56.624 104.515,57.25 106.5,57.25 107,57.75 107,58.5
  L4 SIG w0.2: 95,72.5 95.25,72.25 96.25,72.25 96.5,72 98.25,72 98.43,72.18 100.32,72.18 101.64,70.86
  L4 SIG w0.3: v1(90.5,77) 95,72.5 ; 101.64,70.86 101.64,68.946 103.87,66.716 103.87,65.88 105.012,64.738 105.262,64.738 v4(106.5,63.5) ; P2.16 111.84,58.5 114.67,58.5 J4.16
"MCU OSC IN": C15.2 U2.5 X1.1 | length 13.4
  L1 SIG w0.2: C15.2@102.125,60.5 102.5,60.5 102.75,60.75 104.4,60.75 105.45,59.7 X1.1
  L1 SIG w0.3: U2.5 98.25,61.5 99.25,60.5 C15.2@102.125,60.5
"MCU OSC OUT": R10.1 U2.6 | length 4.1
  L1 SIG w0.3: U2.6 98.75,64 99.25,63.5 R10.1
"MCU SCL 1": J3.4 U2.45 | length 22.9
  L1 SIG w0.3: U2.45 98.5,69.75 99,69.25 v2(99,68.25) ; J3.4 v1(99.25,52.5)
  L4 SIG w0.3: v2(99,68.25) 99,53 99.154,52.846 99.154,52.596 v1(99.25,52.5)
"MCU SDA 1": J3.3 U2.46 | length 21.7
  L1 SIG w0.3: U2.46 97.135,69.25 98,68.385 v2(98,68.25) ; J3.3 v1(98.25,52.5)
  L4 SIG w0.3: v2(98,68.25) 97.5,67.75 97.5,53.164 98.164,52.5 v1(98.25,52.5)
"MCU SWCLK": J1.4 U2.37 | length 5.4
  L1 SIG w0.3: J1.4 94.27,74.98 94.675,74.575 U2.37
"MCU SWDIO": J1.2 U2.34 | length 4.8
  L1 SIG w0.3: J1.2 95.575,79 96.25,79 96.75,78.5 96.75,77.75 97.25,77.25 U2.34
NetD2_A: D2.A D3.K F1.2 R1.1 | length 14.7
  L1 SIG w0.5: D2.A 103.2,99.565 103.2,99.795 103.25,99.845 v5(103.25,101)
  L4 SIG w0.3: v5(103.25,101) 103.25,100.25 103.75,99.75 106.25,99.75 106.75,100.25 R1.1
  L4 SIG w0.5: F1.2 99,101.98 99.65,101.33 99.823,101.33 99.943,101.21 v5@102.957,101.21 ; v5(103.25,101) 103.167,101 v5@102.957,101.21 ; D3.K 103.35,102.35 103.35,101.603 v5@102.957,101.21
NetJ2_A5: J2.A5 R3.1 | length 4.8
  L1 SIG w0.3: v1(100.5,95.75) R3.1
  L4 SIG w0.3: J2.A5 98.8,96.7 99.75,95.75 v1(100.5,95.75)
NetJ2_B5: J2.B5 R5.2 | length 5.4
  L1 SIG w0.3: R5.2 91.94,101.31 94.545,101.31 96.183,99.672 96.183,99.567 J2.B5
PA0: J4.14 P2.14 U2.10 | length 15.9
  L1 SIG w0.2: U2.10 100.75,65.973 100.8,65.923 100.8,65.713 101.513,65 102.114,65
  L1 SIG w0.25: 102.114,65 107.25,65
  L1 SIG w0.3: 107.25,65 108.75,63.5 P2.14
  L4 SIG w0.3: P2.14 111.84,63.58 114.67,63.58 J4.14
PA1: J4.13 P2.13 U2.11 | length 14.8
  L1 SIG w0.2: U2.11 101.269,66.656 101.269,65.844 101.614,65.5
  L1 SIG w0.25: 101.614,65.5 102.25,65.5
  L1 SIG w0.3: 102.25,65.5 102.5,65.5 102.75,65.75 108.75,65.75 109.04,66.04 P2.13
  L4 SIG w0.3: P2.13 111.84,66.12 114.67,66.12 J4.13
PA2: J4.12 P2.12 U2.12 | length 13.9
  L1 SIG w0.3: U2.12 108.175,66.675 110.08,68.58 P2.12
  L4 SIG w0.3: P2.12 111.84,68.66 114.67,68.66 J4.12
PA3: J4.11 P2.11 U2.13 | length 12.8
  L1 SIG w0.3: U2.13 108,68.25 110.731,70.981 111.361,70.981 111.63,71.25 P2.11
  L4 SIG w0.3: P2.11 111.84,71.2 114.67,71.2 J4.11
PA4: J4.10 P2.10 U2.14 | length 13.5
  L1 SIG w0.3: U2.14 106.25,68.75 108.25,70.75 110.911,73.411 111.511,73.411 P2.10
  L4 SIG w0.3: P2.10 111.84,73.74 114.67,73.74 J4.10
PA5: J4.9 P2.9 U2.15 | length 13.7
  L1 SIG w0.3: U2.15@104,69.25 104.81,69.25 P2.9
  L4 SIG w0.3: P2.9 111.84,76.28 114.67,76.28 J4.9
PA6: J4.8 P2.8 U2.16 | length 16.4
  L1 SIG w0.3: U2.16 104.414,69.75 106.5,71.836 106.5,72.252 106.5,73.806 111.434,78.74 P2.8
  L4 SIG w0.3: P2.8 111.84,78.82 114.67,78.82 J4.8
PA7: J4.7 P2.7 U2.17 | length 18.1
  L1 SIG w0.3: U2.17 104.207,70.25 105.5,71.543 105.5,75.02 P2.7
  L4 SIG w0.3: P2.7 111.84,81.36 114.67,81.36 J4.7
PA8: J4.6 P2.6 U2.29 | length 20
  L1 SIG w0.3: U2.29 99.75,77.75 101.75,79.75 105.5,79.75 109.57,83.82 P2.6
  L4 SIG w0.3: P2.6 111.84,83.9 114.67,83.9 J4.6
PA9: J4.5 P2.5 U2.30 | length 22.1
  L1 SIG w0.3: U2.30 99.25,78.75 102,81.5 104.75,81.5 109.61,86.36 P2.5
  L4 SIG w0.3: P2.5 111.84,86.44 114.67,86.44 J4.5
PA10: J4.4 P2.4 U2.31 | length 24.1
  L1 SIG w0.3: U2.31 98.75,79.5 102.271,83.021 104.021,83.021 109.9,88.9 P2.4
  L4 SIG w0.3: P2.4 111.84,88.98 114.67,88.98 J4.4
PA15: J4.3 P2.3 U2.38 | length 34.2
  L1 SIG w0.25: U2.38 95.898,73.25 96.398,72.75 v2(97.5,72.75)
  L1 SIG w0.3: v2(103.7,74.9) 111.23,82.43 111.996,82.43 113.3,83.734 113.3,90.15 ; P2.3 112.01,91.44 113.3,90.15 ; J4.3 113.3,90.15
  L4 SIG w0.2: v2(97.5,72.75) 100.514,72.75 101.293,73.528 101.293,73.656 102.536,74.9 v2@103.683,74.9
  L4 SIG w0.3: P2.3 P2.3@111.84,91.52 ; J4.3@114.67,91.52 J4.3
PB0: J5.16 P3.3 U2.18 | length 30.4
  L1 SIG w0.25: v1(90,58.25) 93,61.25 v1(94.25,61.25) ; v2(100.25,69.75) 101.25,70.75 U2.18
  L4 SIG w0.25: P3.3 83.905,58.335 89.915,58.335 v1(90,58.25) ; v1(94.25,61.25) 96.75,63.75 96.75,67.672 97.029,67.951 97.029,68.381 97.677,69.029 99.529,69.029 v2(100.25,69.75)
  L4 SIG w0.3: J5.16 80.83,58.5 83.74,58.5 P3.3
PB1: J5.15 P3.4 U2.19 | length 30
  L1 SIG w0.25: v2(97.5,70.554) 97.605,70.659 98.615,70.659 98.774,70.5 99.792,70.5 100.542,71.25 U2.19
  L4 SIG w0.25: P3.4 86.21,60.96 87.5,62.25 87.5,64.75 89.25,66.5 91.104,66.5 91.25,66.646 91.25,68.875 93.125,70.75 96.375,70.75 96.571,70.554 v2(97.5,70.554)
  L4 SIG w0.3: J5.15 80.83,61.04 83.74,61.04 P3.4
PB2: J5.14 P3.5 U2.20 | length 27.9
  L1 SIG w0.25: v2(99.3,71.3) 99.449,71.3 99.899,71.75 U2.20
  L4 SIG w0.2: 92.676,71.426 93.176,71.426 93.324,71.574 96.152,71.574 96.418,71.308 99.292,71.308 v2(99.3,71.3)
  L4 SIG w0.25: P3.5 86,63.5 86.25,63.75 86.25,66.55 89.3,69.6 89.924,69.6 91.75,71.426 92.676,71.426
  L4 SIG w0.3: J5.14 80.83,63.58 83.74,63.58 P3.5
PB3: J5.13 P3.6 U2.39 | length 27.9
  L1 SIG w0.3: J5.13 80.94,66.2 82.3,67.56 ; P3.6 82.3,67.56 ; U2.39 93.05,72.75 91.4,74.4 87.979,74.4 85.029,77.35 83.344,77.35 82.3,76.306 82.3,67.56
  L4 SIG w0.3: J5.13 J5.13@80.83,66.12 ; P3.6@83.74,66.12 P3.6
PB4: J5.12 P3.7 U2.40 | length 16.9
  L1 SIG w0.25: v1(90.5,72.8) 91.693,72.8 92.243,72.25 U2.40
  L1 SIG w0.3: P3.7 85.8,70.56 v1(85.8,72.1)
  L4 SIG w0.25: v1(85.8,72.1) 85.975,72.275 87.875,72.275 88.4,72.8 v1(90.5,72.8)
  L4 SIG w0.3: J5.12 80.83,68.66 83.74,68.66 P3.7
PB5: J5.11 P3.8 U2.41 | length 14.3
  L1 SIG w0.25: v1(90.6,71.7) 90.64,71.74 94.665,71.74 U2.41
  L4 SIG w0.25: P3.8 88.22,71.12 88.8,71.7 v1(90.6,71.7)
  L4 SIG w0.3: J5.11 80.83,71.2 83.74,71.2 P3.8
PB6: J5.10 P3.9 U2.42 | length 15.7
  L1 SIG w0.25: v1(87.1,73.6) 90.3,70.4 91.163,70.4 92.013,71.25 U2.42
  L4 SIG w0.25: P3.9 85.16,73.66 85.175,73.675 87.025,73.675 v1(87.1,73.6)
  L4 SIG w0.3: J5.10 80.83,73.74 83.74,73.74 P3.9
PB7: J5.9 P3.10 U2.43 | length 17.5
  L1 SIG w0.25: P3.10 84.854,75.166 85.654,74.366 85.654,73.596 89.451,69.799 91.799,69.799 92.75,70.75 U2.43
  L4 SIG w0.3: J5.9 80.83,76.28 83.74,76.28 P3.10
PB10: J5.8 P3.11 U2.21 | length 26.3
  L1 SIG w0.25: v2(98.5,73.5) 99.75,72.25 101.435,72.25 101.478,72.207 102.455,72.207 102.488,72.24 103.315,72.24 U2.21
  L1 SIG w0.3: P3.11 84.06,78.5 86.75,78.5 89.75,75.5 92,75.5 v2(92.75,76.25)
  L4 SIG w0.25: v2(92.75,76.25) 95.917,73.083 96.802,73.083 97.219,73.5 v2(98.5,73.5)
  L4 SIG w0.3: J5.8 80.83,78.82 83.74,78.82 P3.11
PB11: J5.7 P3.12 U2.22 | length 27.9
  L1 SIG w0.25: v2(99.75,73.5) 100.5,72.75 U2.22
  L4 SIG w0.25: P3.12 83.85,81.25 86.75,81.25 90,78 98.25,78 99.75,76.5 v2(99.75,73.5)
  L4 SIG w0.3: J5.7 80.83,81.36 83.74,81.36 P3.12
PB12: J5.6 P3.13 U2.25 | length 26.7
  L1 SIG w0.3: U2.25 101.75,76 102.2,76.45 102.2,77.2 v2(102.25,77.25)
  L4 SIG w0.3: J5.6 80.83,83.9 83.74,83.9 P3.13 96.18,83.82 102.234,77.766 102.234,77.266 v2(102.25,77.25)
PB13: J5.5 P3.14 U2.26 | length 26.6
  L1 SIG w0.3: P3.14 85.14,86.36 88.45,83.05 88.45,82.05 v2(88.5,82) ; U2.26 v2(101.25,76.75)
  L4 SIG w0.3: J5.5 80.83,86.44 83.74,86.44 P3.14 ; v2(88.5,82) 96,82 v2(101.25,76.75)
PB14: J5.4 P3.15 U2.27 | length 35
  L1 SIG w0.3: v2(100.643,73.798) 100.719,73.874 100.719,74.323 100.75,74.354 U2.27
  L4 SIG w0.3: J5.4 80.83,88.98 83.74,88.98 P3.15 87.6,88.9 90.75,85.75 97.25,85.75 103.25,79.75 103.25,76.405 v2(100.643,73.798)
PB15: J5.3 P3.16 U2.28 | length 37.2
  L1 SIG w0.3: U2.28 100.25,77 101.95,78.7 104.45,78.7 v2(104.5,78.75)
  L4 SIG w0.3: J5.3 80.83,91.52 83.74,91.52 P3.16 83.88,91.5 87.25,91.5 91,87.75 98,87.75 104.5,81.25 v2(104.5,78.75)
USB_CONN_D_N: D4.3 J2.A7 J2.B7 | length 6.6
  L1 SIG w0.26: D4.3 96.6,94.959 97.289,95.648 97.289,96.627 97.293,96.631 97.293,97.851 97.1,98.045 J2.A7 97.1,98.226 97.875,99.002 97.875,99.425 J2.B7
USB_CONN_D_P: D4.1 J2.A6 J2.B6 | length 6.6
  L1 SIG w0.26: J2.A6 97.95,98.045 97.757,97.851 97.757,96.439 97.752,96.435 97.752,95.606 98.5,94.859 D4.1
  L4 SIG w0.26: J2.B6 97.175,99.425 97.175,99.002 97.95,98.226 J2.A6
USB_D_N: D4.4 U2.33 | length 16.4
  L1 SIG w0.26: D4.4 96.6,90.95 96.92,90.63 96.92,90.557 97.157,90.32 97.166,90.32 97.318,90.168 97.318,89.692 97.318,88.947 97.768,88.497 97.768,76.046 97.758,76.036 97.758,75.333 U2.33
USB_D_P: D4.6 U2.32 | length 16.4
  L1 SIG w0.26: U2.32 98.242,75.333 98.242,76.036 98.232,76.046 98.232,88.689 97.782,89.139 97.782,90.168 97.934,90.32 97.943,90.32 98.18,90.557 98.18,90.63 98.5,90.95 D4.6
"USER BUTTON1": C17.2 R8.1 SW3.34 U2.4 | length 21.6
  L1 SIG w0.3: R8.1 C17.2 91.66,54.235 91.675,54.25 ; SW3.34@91.675,51.425 91.675,54.25 ; v1(91.804,57) 91.74,56.935 91.74,55.64 91.675,55.575 91.675,54.25 ; v1(96.5,61) 97.75,62.25 U2.4
  L4 SIG w0.3: v1(91.804,57) 91.804,57.054 95.654,60.904 96.404,60.904 v1(96.5,61)
"USER LED1": R6.2 U2.2 | length 15
  L1 SIG w0.3: R6.2 88.035,57.422 92.604,61.992 93.342,61.992 96.75,65.4 U2.2
"USER LED12": R9.2 U2.3 | length 23.8
  L1 SIG w0.3: U2.3 97.25,63.5 95.25,61.5 95.25,59 96.75,57.5 v1(102.75,57.5) ; R9.2 107.51,55.985 108.154,56.629 108.154,56.904 v1(108.25,57)
  L4 SIG w0.3: v1(102.75,57.5) 107.615,57.5 108.115,57 v1(108.25,57)
Vbat: C8.2 C22.1 D10.K J4.15 P2.15 U2.1 | length 54.8
  L1 SIG w0.3: D10.K 96.25,66.75 U2.1 96.25,65.676 96.17,65.596 95.596,65.596 v1(95.5,65.5)
  L4 SIG w0.3: C8.2 v1(95.5,65.5) 95.5,63.75 91,59.25 91,53.5 94.75,49.75 107.75,49.75 108.75,50.75 108.75,52 108.4,52.35 108.4,55.763 109.52,56.883 C22.1@109.52,60.98
  L4 SIG w0.5: C22.1@109.52,60.98 111.74,60.98 P2.15 111.84,61.04 114.67,61.04 J4.15
VBUS: D4.5 F1.1 J2.A4 J2.A9 J2.B4 J2.B9 | length 19.2
  L1 SIG w0.3: D4.5 97.55,91.55 97.85,91.85 97.85,91.951 98.399,92.5 99.474,92.5 99.65,92.676 J2.A4
  L4 SIG w0.5: J2.A9 J2.B4 95.4,100.1 95.6,100.3 95.888,100.3 ; J2.A4 J2.B9 99.621,99.529 99.621,99.957 99.279,100.3 96.175,100.3 ; 95.888,100.3 96.175,100.3 ; 95.888,100.3 95.888,101.33 96.058,101.5 96.175,101.5 96.175,100.3
"VBUS RP": C11.2 D2.K FB1.1 | length 4.3
  L1 SIG w0.5: D2.K 107.6,99.5 107.75,99.35 FB1.1
"XTAL IN": C16.2 R10.2 X1.3 | length 3.6
  L1 SIG w0.3: R10.2 C16.2 103.45,62 X1.3
pads on no net: J1.6 J1.7 J1.8 J2.A8 J2.B8 J3.S1 J3.S2

## Polygon pours and split planes (outlines as drawn)
+3V3 on L3 (PWR) "+3V3_L03_P011" (solid, pour order 11): 80,92.5 115.5,92.5 115.5,48 cw(c114.5,48) 114.5,47 81,47 cw(c81,48) 80,48
+5V on L3 (PWR) "+5V_L03_P010" (solid, pour order 10): 80,102 cw(c81,102) 81,103 114.5,103 cw(c114.5,102) 115.5,102 115.5,93.144 80,93.144
+3V3A on L3 (PWR) "+3V3A_L03_P001" (solid, pour order 1): 106,87 106,68 101,68 101,67 99.5,67 99.5,64 109,64 109,90 102,90 102,87
GND on L2 (GND) "GND_L02_P012" (solid, pour order 12): 81,103 ccw(c81,102) 80,102 80,48 ccw(c81,48) 81,47 114.5,47 ccw(c114.5,48) 115.5,48 115.5,101.5 ccw(c114,101.5) 114,103 113,103

## Silkscreen, mask and mechanical layers (free items; w line width, h text height)
Top Overlay:
  text "USB" at 96,95.5 h2
  text "SWD" at 97,80 h2
  text "BOOT" at 91.5,63 h2
  text "I2C" at 96.5,54 h2
  text "USER" at 90.5,49 h2
  text "RESET" at 101,49 h2
Bottom Overlay:
  text "JLCJLCJLCJLC" at 102.496,47.504 h0.8

## Text inside footprints (layer, text, board x,y; h text height)
C10: Mechanical 13 "+" at 103.182,89.161 h1 r180; Bottom Overlay "+" at 101.667,90.5 h1 r180
C13: Mechanical 13 "+" at 89.917,90.25 h1 r180; Bottom Overlay "+" at 88.417,91.75 h1 r180
D1: Mechanical 13 "+" at 109.067,101.858 h0.5
D7: Mechanical 13 "+" at 87.427,53.302 h0.5 r90
D9: Mechanical 13 "+" at 106.802,53.552 h0.5 r90